# Altium PCB Slave_V1.PcbDoc
Units mil, origin at the board's own origin, x right, y up, seen from the top; angles counter-clockwise.
Board outline 1505 x 2615 mil, 2 copper layers (Top Layer, Bottom Layer); 51 components, 33 nets, 187 pads, 88 vias.
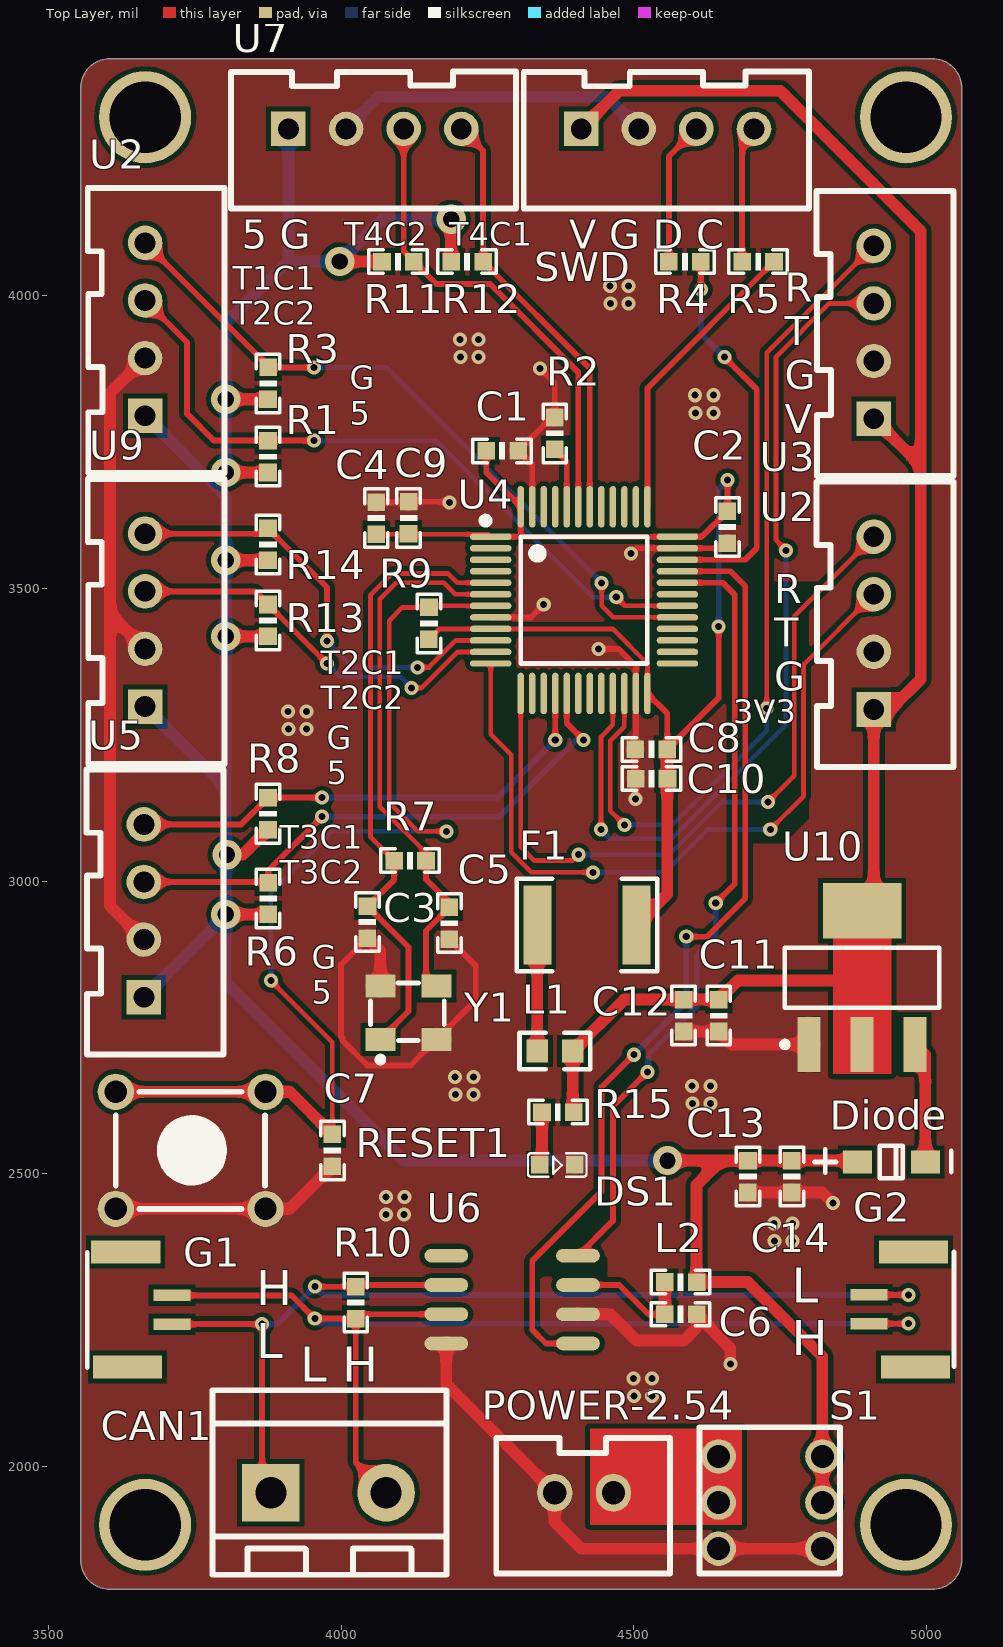
[diagram p0: Top Layer view]
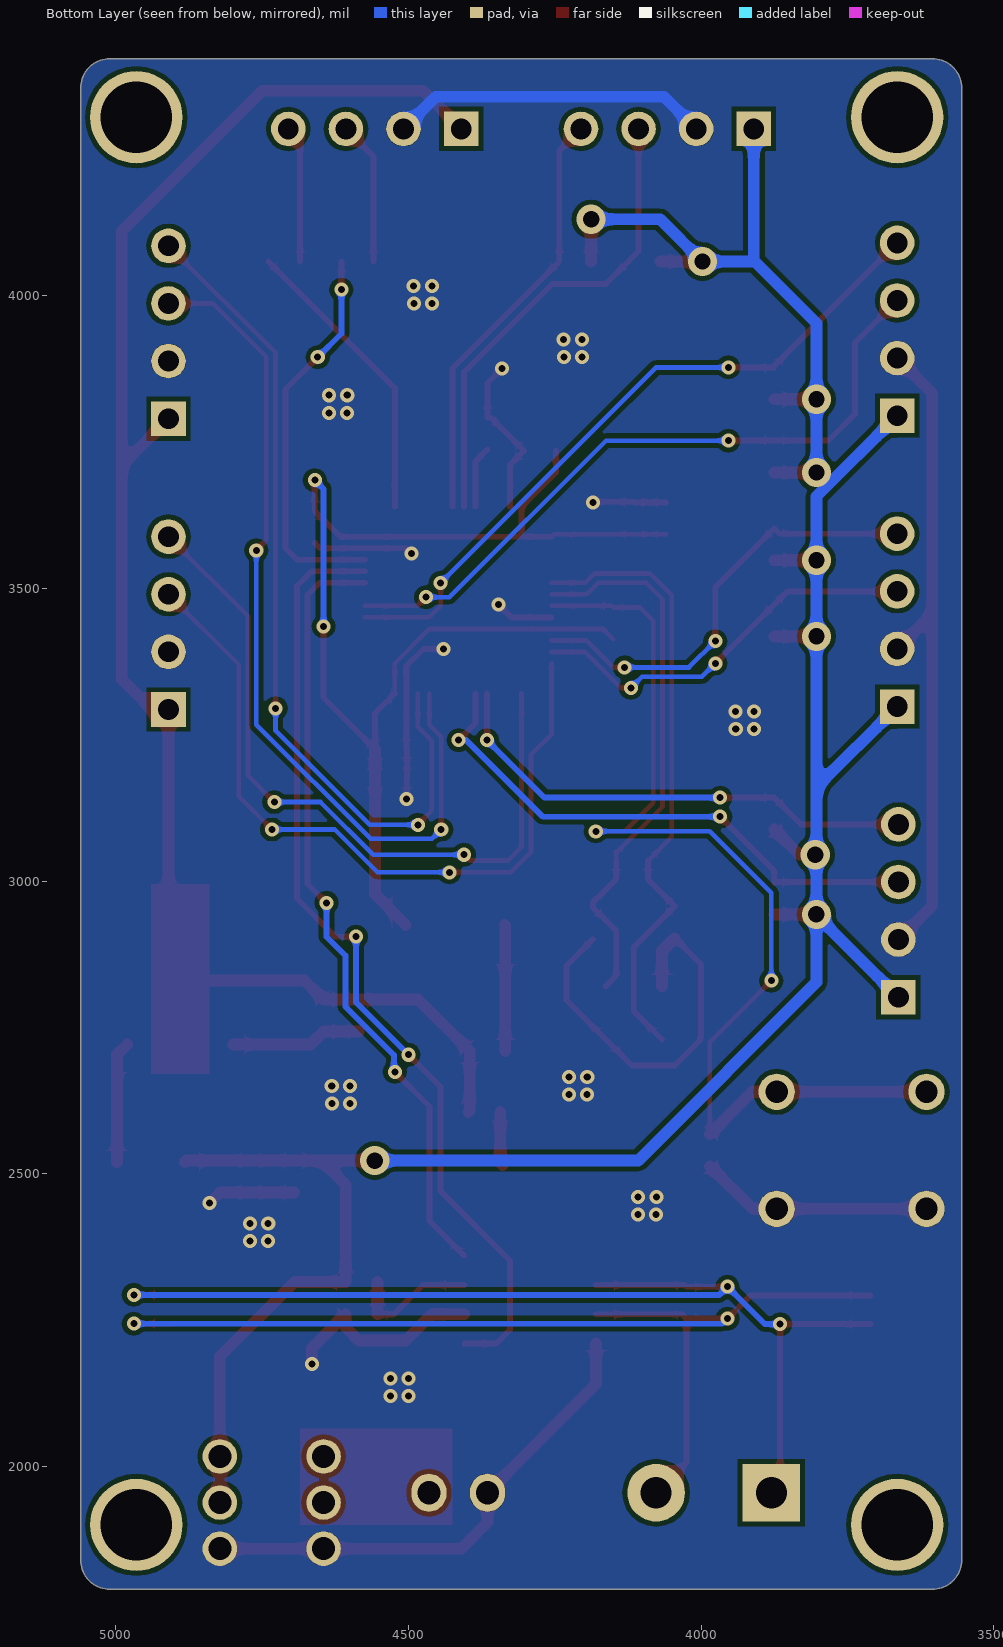
[diagram p1: Bottom Layer view, seen from below]

## Layer stack, top to bottom
Top Solder: solder mask 0.4, Solder Resist, Dk 3.5
Top Layer: signal copper 1.4
Dielectric 1: dielectric 12.6, FR-4, Dk 4.8
Bottom Layer: signal copper 1.4
Bottom Solder: solder mask 0.4, Solder Resist, Dk 3.5

## Board outline
3555,1840 ccw(c3605,1840) 3605,1790 5010,1790 ccw(c5010,1840) 5060,1840 5060,4355 ccw(c5010,4355) 5010,4405 3605,4405 ccw(c3605,4355) 3555,4355

## Design rules (kind name [scope] priority, off if disabled: settings)
Clearance [All] p1: gap=8 ignorepadtopadclearanceinfootprint=FALSE
PolygonConnect [IsVia] p1: connectstyle=Direct reliefconductorwidth=10 reliefentries=4 polygonreliefangle="90 Angle" airgapwidth=10
RoutingVias [All] p1: holewidth=28 width=50 viastyle="Through Hole" minholewidth=28 minwidth=50 maxholewidth=28 maxwidth=50
SolderMaskExpansion [All] p1: expansion=4
Width gnd [All] p1: maxlimit=30 minlimit=8 preferedwidth=15
Width 5v [All] p2: maxlimit=30 minlimit=8 preferedwidth=15
Width [All] p3: maxlimit=20 minlimit=6 preferedwidth=8
30 further rules are at their usual default settings.

## Classes and differential pairs
net class GND: GND
net class 5V: 5V

## Components (designator, comment, footprint, x,y, rotation, side; value= is the part's Value field where it differs from the comment)
C1 "0.1uf" 0603P 4275,3735 r0 top
C2 "0.1uf" 0603P 4660,3605 r270 top
C3 "22PF" 0603P 4045,2930 r270 top
C4 "0.1uf" 0603P 4060,3620 r270 top
C5 "22" 0603P 4185,2928 r270 top
C6 "104" 0603P 4579.76,2260 r0 top
C7 "0.1uf" 0603P 3985,2540 r90 top
C8 "1uf" 0603P 4530,3225 r180 top
C9 "0.1uf" 0603P 4115.06,3620.43 r90 top
C10 "0.1uf" 0603P 4530,3175 r0 top
C11 "104" 0603P 4645,2770 r90 top
C12 "104" 0603P 4585,2770 r90 top
C13 "106" 0603P 4695,2495 r90 top
C14 "104" 0603P 4770,2495 r90 top
CAN1 "CAN" HEAD2L-0.8 3880,1955 r0 top
Diode "D1" LC-SOD-123F 4940,2520 r180 top
DS1 "LED1" 0603_LED 4368.16,2515 r0 top
F1 "0.3A 60VPTC FUSE" LC-1812_R 4420,2925 r0 top
G1 "CAN-GH1.25" GH1.25_1*2_lishi 3565.94,2169 r90 top
G2 "CAN-GH1.25" GH1.25_1*2_lishi 5047.06,2367 r270 top
L1 "220R,2.0A,0.05DCR" L_0603 4365.16,2709.66 r0 top
L2 "220R,2.0A,0.05DCR" 0603P 4579.76,2315 r0 top
POWER-2.54 "XH2.54" XH2.54-2 4465,1955 r0 top
R1 "3.3K" 0603P 3875,3725 r90 top
R2 "10K" 0603P 4365,3765 r270 top
R3 "3.3K" 0603P 3875.06,3850 r90 top
R4 "100R" 0603P 4587.5,4058.3 r180 top
R5 "100R" 0603P 4712.5,4058.3 r180 top
R6 "3.3K" 0603P 3875.13,2970 r90 top
R7 "1M" 0603P 4117.5,3035.06 r0 top
R8 "3.3K" 0603P 3875,3115 r90 top
R9 "10K" 0603P 4150,3440 r90 top
R10 "120R" 0603P 4025,2280 r270 top
R11 "3.3K" 0603P 4096.85,4058.43 r0 top
R12 "3.3K" 0603P 4215,4058.43 r0 top
R13 "3.3K" 0603P 3875,3445 r90 top
R14 "3.3K" 0603P 3875,3575 r90 top
R15 "470R" 0603P 4370.16,2605.37 r0 top
RESET1 "KEY_M" KEY_M 3615,2640 r0 top
S1 "自锁开关" 自锁开关5.8*5.8 4822.17,2017 r270 top
SWD "HEADER" XH2.54-4 4410,4285 r0 top (schematic designator U1)
U2 "串口通信" XH2.54-4 4910,3293.15 r90 top (schematic designator U8)
U2 "编码器" XH2.54-4 3665,3795 r90 top
U3 "串口通信" XH2.54-4 4910,3790 r90 top
U4 "STM32F103C8T6" LQFP-48_7x7x05P 4415,3480 r270 top
U5 "编码器" XH2.54-4 3663,2801.57 r90 top
U6 "TJA1050" SOP8 4292.24,2285 r90 top
U7 "编码器" XH2.54-4 3910,4285 r0 top
U9 "编码器" XH2.54-4 3665,3298.15 r90 top
U10 "AMS1117-3.3" SOT223 4890,2835 r0 top locked
Y1 "8MHZ-无源" "XTAL3225   无源" 4115,2775 r0 top

## Footprints (in the part's own frame and the unit in brackets; to place one, negate y for a bottom-side part, rotate by r counter-clockwise, add the part's x,y. Pads: shape width x height; smd on the part's side, far side on the other; paste and mask are expansions set on the pad)
0603_LED [mil]
  rect 30x30 smd: 1(-29,0) 2(31,0)
  silkscreen extent -49,-20 51,20, body extent -40,-25 40,25, height 43
0603P [mil]
  rect 30x30 smd: 1(-27,0) 2(27.5,-0.06)
  silkscreen extent -50,-20 50,20
GH1.25_1*2_lishi [mm]
  rect 0.5x1.6 smd: 1(1.88,-3.683) 2(3.13,-3.683)
  rect 1x3 smd: ""(0.025,-1.753) ""(5.004,-1.676)
  silkscreen extent 0,0 5,0
HEAD2L-0.8 [mm]
  rect 2.5x2.5 hole 1.35: 1(0,0)
  round 2.5 hole 1.35: 2(5,0)
  silkscreen extent -2.54,-3.56 7.62,4.44
KEY_M [mil]
  round 62 hole 38: 1(0,0) 1(255.91,0) 2(0,-200) 2(255.91,-200)
  silkscreen extent 0,-200 255,0
L_0603 [mm]
  rect 0.93x0.98 smd: 1(-0.77,0) 2(0.77,0)
  silkscreen extent -1.54,-0.79 1.53,0.79, body extent -0.85,-0.4 0.85,0.4, height 0.56
LC-1812_R [mm]
  rect 1.2x3.42 smd: 1(-2.15,0) 2(2.15,0)
  silkscreen extent -3.05,-2.01 3.05,2.01, body extent -2.25,-1.6 2.25,1.6, height 0.59
LC-SOD-123F [mm]
  rect 1.25x1 smd: 1(1.475,0) 2(-1.475,0)
  silkscreen extent -2.59,-0.7 3.35,0.7, body extent -1.9,-0.85 1.85,0.85, height 1.2
LQFP-48_7x7x05P [mm]
  oval 0.28x1.8 smd mask+0.051: 1(-2.75,-4.05) 2(-2.25,-4.05) 3(-1.75,-4.05) 4(-1.25,-4.05) 5(-0.75,-4.05) 6(-0.25,-4.05) 7(0.25,-4.05) 8(0.75,-4.05) 9(1.25,-4.05) 10(1.75,-4.05) 11(2.25,-4.05) 12(2.75,-4.05) 25(2.75,4.05) 26(2.25,4.05) 27(1.75,4.05) 28(1.25,4.05) 29(0.75,4.05) 30(0.25,4.05) 31(-0.25,4.05) 32(-0.75,4.05) 33(-1.25,4.05) 34(-1.75,4.05) 35(-2.25,4.05) 36(-2.75,4.05)
  oval 1.8x0.28 smd mask+0.051: 13(4.05,-2.75) 14(4.05,-2.25) 15(4.05,-1.75) 16(4.05,-1.25) 17(4.05,-0.75) 18(4.05,-0.25) 19(4.05,0.25) 20(4.05,0.75) 21(4.05,1.25) 22(4.05,1.75) 23(4.05,2.25) 24(4.05,2.75) 37(-4.05,2.75) 38(-4.05,2.25) 39(-4.05,1.75) 40(-4.05,1.25) 41(-4.05,0.75) 42(-4.05,0.25) 43(-4.05,-0.25) 44(-4.05,-0.75) 45(-4.05,-1.25) 46(-4.05,-1.75) 47(-4.05,-2.25) 48(-4.05,-2.75)
  silkscreen extent -3.6,-4.42 2.75,2.75, body extent -4.5,-4.5 4.5,4.5, height 1.45
SOP8 [mm]
  round 0.508 on Top Overlay: 0(-3.175,-2.858)
  oval 0.6x1.9 smd: 1(-1.905,-2.858) 2(-0.635,-2.858) 3(0.635,-2.858) 4(1.905,-2.858) 5(1.905,2.858) 6(0.635,2.858) 7(-0.635,2.858) 8(-1.905,2.858)
  body extent -2.49,-2 2.49,1.99, height 1.75
SOT223 [mm]
  rect 1x2.4 smd: 1(-2.3,-2.9) 2(0,-2.9) 3(2.3,-2.9)
  rect 3.4x2.4 smd: 4(0,2.9)
  silkscreen extent -3.47,-3.02 3.35,1.3, body extent -3.35,-1.85 3.35,1.85, height 1.8
XH2.54-2 [mil]
  oval 60x65 hole 39.37: 1(0,0) 2(-100.1,0)
  silkscreen extent -200,-138 97,93, body extent -198,-142 98,94, height 276
XH2.54-4 [mm]
  rect 1.5x1.5 hole 0.9: 1(0,0)
  round 1.5 hole 0.9: 2(2.5,0) 3(5,0) 4(7.5,0)
  silkscreen extent -2.49,-3.45 9.88,2.49, body extent -2.47,-3.38 9.93,2.37, height 7
"XTAL3225   无源" [mil]
  rect 51.18x39.37 smd: 1(-48,-45.5) 2(48,-45.5) 3(48,45.5) 4(-48,45.5)
  silkscreen extent -65,-85 61,51
自锁开关5.8*5.8 [mm]
  round 1.5 hole 1: 1(0,-4.5) 2(2,-4.5) 3(4,-4.5) 4(0,0) 5(2,0) 6(4,0)
  silkscreen extent -1.27,-5.33 5.08,0.77

## Part data
C1 C2 C3 C4 C5 C6 C7 C8 C9 C10 C11 C12 C13 C14: library part C
CAN1: library part HEAD2
Diode: library part 肖特基
DS1: library part LED2, "Typical RED, GREEN, YELLOW, AMBER GaAs LED", PackageDocument=Feb-2002, LatestRevisionDate=17-Jul-2002, LatestRevisionNote="Re-released for DXP Platform.", PackageReference=3.2X1.6X1.1, Published=8-Jun-2000, Publisher="Altium Limited"
F1: library part "Fuse 1_2", "Fuse", LatestRevisionDate=17-Jul-2002, LatestRevisionNote="Re-released for DXP Platform.", PackageDescription="Thru-Hole; 2 Leads", PackageReference=PIN-W2/E2.8, Published=8-Jun-2000, Publisher="Altium Limited"
G1 G2: library part GH1.25-CAN
L1 L2: library part L
POWER-2.54: library part XH2.54-2
R1 R3 R6 R8 R11 R12 R13 R14: library part R-0805, "R-0805"
R2 R4 R5 R7 R9 R10 R15: library part R
S1: library part Switch_5.8
SWD U2 U3: library part XH2.54插座-4P
U2 U5 U7 U9: library part 编码器4P
U6: library part SN65HVD230D
U10: library part AMS1117
Y1: library part XTAL-3225

## Free pads (board coordinates)
  round 157.48 hole 122.05: 0(3665,1900) 0(3665,4305) 0(4965,1900) 0(4965,4305)

## Via types
v1: diameter 24, hole 12, Top Layer to Bottom Layer, tented both sides, 79 vias
v2: diameter 50, hole 28, Top Layer to Bottom Layer, tented both sides, 9 vias

## Nets (pads, with @x,y where several pads share a name; then routed paths per layer and width w, separated by ;. In a path a pad name is that pad's centre, name@x,y a point inside that pad or via, vN(x,y) a via of type N, cw(c..) or ccw(c..) an arc to the next point about the centre after c; other vN are vias at no path point)
3V3: C11.2 C12.2 L1.2 R15.2 SWD.1 U2.1@4910,3293.15 U3.1 U10.2 U10.4 | length 2707.8
  Top Layer w20: R15.2 4395.47,2607.49 L1.2 4483.31,2797.5 C12.2 C11.2 4677.56,2830 4910,2830 ; SWD.1 4475,4350 4750,4350 4990,4110 4990,3710 ; U10.4 4910,2969.17 4910,3293.15 4938.15,3293.15 4990,3345 4990,3710 ; U3.1 4990,3710
3V3_MCU: C1.1 C2.1 C4.2 C8.1 C9.1 C10.2 F1.2 R9.1 U4.1 U4.9 U4.24 U4.36 U4.48 | length 2236.1
  Top Layer w8: C4.2 4251.32,3592.5 U4.1 ; R9.1 4167.79,3430.79 U4.9 4464.21,3430.79 4523.27,3371.73 U4.24
  Top Layer w10: C1.1 4248,3698.18 U4.48 4306.73,3593.27 4311.73,3588.27 ; U4.1 4311.73,3588.27 ; U4.24 4557,3286.82 C8.1 4645.06,3313.06 v1(4645.06,3435) ; v1(4660,3684.94) C2.1 4616.27,3588.27 U4.36 4311.73,3588.27
  Top Layer w20: F1.2 4557,2977.35 C8.1
  Bottom Layer w10: v1(4645.06,3435) 4645.06,3670 v1(4660,3684.94)
5V: C13.2 C14.2 Diode.1 L2.2 R1.1 R3.1 R6.1 R8.1 R11.1 R12.1 R13.1 R14.1 S1.4 S1.5 U2.1@3665,3795 U5.1 U7.1 U9.1 | length 4899.7
  Top Layer w20: v2(3802.87,3418) R13.1 ; v2(3802.87,3548) R14.1 ; v2(3802.87,3698) R1.1 ; v2(3802.94,3823) R3.1 ; v2(3803,2943) R6.1 ; v2(3805,3045) 3832,3045 R8.1 ; v2(3997.72,4058.43) R11.1 ; R12.1 v2(4188,4130.55) ; v2(4557.5,2522.5) 4648.56,2522.5 ; S1.5 S1.4 4822.17,2187.77 4695,2314.94 L2.2 4607.26,2481.2 4648.56,2522.5 ; Diode.1 4879.43,2522.5 C14.2 C13.2 4648.56,2522.5
  Bottom Layer w20: U5.1 v2@3803,2941.57 ; U9.1 3803,3160.15 ; U2.1@3665,3795 3803,3657 3803,3160.15 ; v2@3803,3698 3803,3822.94 v2(3802.94,3823) 3802.94,3952.94 3908.43,4058.43 ; U7.1 3910,4060 3908.43,4058.43 ; v2(4188,4130.55) 4069.85,4130.55 v2(3997.72,4058.43) 3908.43,4058.43 ; v2(4557.5,2522.5) 4107.5,2522.5 3803,2827 v2@3803,2941.57 ; v2@3803,2941.57 v2(3803,2943) 3803,3160.15
CAN1_H: CAN1.2 G1.2 G2.2 R10.2 U6.7 | length 1892.4
  Top Layer w10: G1.2 3915.22,2292.21 v1(3954.94,2252.5) R10.2 ; CAN1.2 4024.94,2006.91 R10.2 ; U6.7 4032.44,2260 R10.2 ; G2.2 v1(4969.21,2243.79)
  Bottom Layer w10: v1(3954.94,2252.5) 3963.65,2243.79 v1(4969.21,2243.79)
CAN1_L: CAN1.1 G1.1 G2.1 R10.1 U6.6 | length 1877.9
  Top Layer w10: G1.1 v1(3865,2243) 3865,1970 CAN1.1 ; v1(3955,2307) R10.1 4028,2310 U6.6 ; G2.1 v1(4969.21,2293)
  Bottom Layer w10: v1(3865,2243) 3891,2243 v1(3955,2307) 3969,2293 v1(4969.21,2293)
"CAN RX": U4.32 U6.4 | length 1346.2
  Top Layer w10: U6.4 4464.21,2419.45 4464.21,2615 v1(4523.27,2674.06) ; U4.32 4651.84,3509.53 4672.32,3489.06 4672.32,2995 v1(4640,2962.68)
  Bottom Layer w10: v1(4523.27,2674.06) 4525,2675.79 4525,2702.85 4607.56,2785.42 4607.56,2872.56 4640,2905 v1(4640,2962.68)
"CAN TX": U4.33 U6.1 | length 1656.5
  Top Layer w10: U6.1 4350,2210 4326.42,2233.58 4326.42,2351.42 4445,2470 4445,2648.31 v1(4500,2703.31) ; U4.33 4665.32,3529.21 4690.32,3504.21 4690.32,2970.32 4625,2905 v1(4589.56,2905)
  Bottom Layer w10: v1(4500,2703.31) 4589.56,2792.87 v1(4589.56,2905)
GND: C1.2 C2.2 C3.2 C4.1 C5.2 C6.2 C7.1 C8.2 C9.2 C10.1 C11.1 C12.1 C13.1 C14.1 DS1.2 POWER-2.54.2 R2.1 RESET1.2 S1.3 S1.6 SWD.2 U2.2 U3.2 U4.8 U4.23 U4.35 U4.47 U5.2 U6.2 U6.8 U7.2 U9.2 U10.1 Y1.2 Y1.4 | length 5356.2
  Top Layer w10: C3.2 4000,2857.56 4000,2734.04 4002.06,2731.98 4002.06,2727.94 4045,2685 4118.5,2685 Y1.2 4230,2796.5 4230,2855.44 C5.2 ; C4.1 4114.2,3647 C9.2 4184.07,3647.93 v1(4185,3647) ; U4.8 4324.46,3450.47 4346.1,3472.11 v1(4346.1,3472.5) ; U4.47 4326.42,3711.02 C1.2 4359.56,3792 R2.1 4365,3851.02 v1(4340,3876.02) ; v1(4440,3396.57) 4474.38,3396.57 4503.58,3367.38 U4.23 4503.58,3226.15 C8.2 4502.5,3175.5 C10.1 v1(4503,3140) ; v1(4495,3560) 4503.58,3568.58 U4.35 4651.02,3568.58 C2.2
  Top Layer w20: RESET1.2@3615,2440 3870.91,2440 3912,2440 C7.1 ; U5.2 3605,2958 3605,3456.57 ; U9.2 3605,3456.57 ; U2.2@3665,3893.43 3605,3833.43 3605,3456.57 ; C3.2 4067,2880.44 Y1.4 ; U6.8 4179.72,2140.18 POWER-2.54.2 4364.9,1904.62 4410,1859.52 S1.3 S1.6 ; U6.2 4460,2260 4505,2215 4585,2215 4607.26,2237.26 C6.2 4665,2202.2 v1(4665,2175) ; C12.1 C11.1 4667.17,2720.83 U10.1 ; C13.1 C14.1 4822,2468 v1(4840,2450)
  Bottom Layer w20: U7.2 4063.43,4340 4453.43,4340 SWD.2
  other v1: 4500,2120 4530.87,2120 4499.56,2150 4531.06,2150 4740,2385 4770.87,2385 4739.56,2415 4771.06,2415 4076.85,2430 4107.72,2430 4076.41,2460 4107.91,2460 4600,2620 4630.87,2620 4195,2635 4225.87,2635 4599.56,2650 4631.06,2650 4194.56,2665 4226.06,2665 3910,3260 3940.87,3260 3909.56,3290 3941.06,3290 4605,3800 4635.87,3800 4604.56,3830 4636.06,3830 4203.68,3895 4234.56,3895 4203.25,3925 4234.75,3925 4460,3986.85 4490.87,3986.85 4459.56,4016.85 4491.06,4016.85
NetC3_1: C3.1 R7.1 U4.5 Y1.1 | length 1070.7
  Top Layer w8: R7.1 4050,3075.56 4050,3488 4087.53,3525.53 4182.1,3525.53 4198.1,3509.53 U4.5
  Top Layer w10: Y1.1 4115,2777.5 4115,2887 C3.1 4090.5,3002.5 R7.1
NetC5_1: C5.1 R7.2 U4.6 Y1.3 | length 943.6
  Top Layer w8: R7.2 4145,3048 4066,3127 4066,3481.37 4094.16,3509.53 4175.47,3509.53 4195.16,3489.84 U4.6
  Top Layer w10: R7.2 4145,3003 4185,2963 C5.1 4145,2915 4145,2838.5 Y1.3
NetC6_1: C6.1 L2.1 U6.3 | length 223.7
  Top Layer w10: U6.3 4475,2310 4525,2260 C6.1
  Top Layer w20: C6.1 L2.1
NetC7_2: C7.2 R9.2 RESET1.1 U4.7 | length 1813.1
  Top Layer w8: v1(3880,2830) 3985.06,2724.94 C7.2 ; v1(4180,3085) 4130.63,3085 4082,3133.63 4082,3445 4104.5,3467.5 R9.2 4152.72,3470.16 U4.7
  Top Layer w20: RESET1.1@3615,2640 3870.91,2640 3912.56,2640 C7.2
  Bottom Layer w8: v1(3880,2830) 3880,2980 3985,3085 v1(4180,3085)
NetDiode_2: Diode.2 U10.3 | length 208.1
  Top Layer w20: U10.3 4998.07,2703.31 Diode.2
NetDS1_1: DS1.1 R15.1 | length 92
  Top Layer w20: DS1.1 4343.16,2519 R15.1
NetF1_1: F1.1 L1.1 | length 215.6
  Top Layer w20: L1.1 4334.84,2924.49 F1.1
NetPOWER-2.54_1: POWER-2.54.1 S1.1 S1.2
NetR2_2: R2.2 U4.44 | length 106.6
  Top Layer w10: R2.2 4385.47,3716.96 U4.44
NetR4_2: R4.2 SWD.3 | length 246
  Top Layer w10: R4.2 4560,4238.15 SWD.3
NetR5_2: R5.2 SWD.4 | length 235
  Top Layer w10: R5.2 4685,4264.72 SWD.4
SWCLK: R5.1 U4.37 | length 508.4
  Top Layer w10: U4.37 4523.27,3842.07 R5.1
SWDIO: R4.1 U4.34 | length 673
  Top Layer w10: U4.34 4690.32,3548.9 4710,3568.58 4710,3840 v1(4655,3895) ; v1(4614.5,4010.5) R4.1
  Bottom Layer w10: v1(4614.5,4010.5) 4614.5,3935.5 v1(4655,3895)
TIM1_CH1: R3.2 U2.4@3665,4090.28 U4.29 | length 1199.2
  Top Layer w8: v1(4445,3509.53) 4445,3470 4464.53,3450.47 U4.29
  Top Layer w10: U2.4@3665,4090.28 3875.13,3880.15 R3.2 v1(3953.52,3877.5)
  Bottom Layer w8: v1(3953.52,3877.5) 4077.03,3877.5 v1(4445,3509.53)
TIM1_CH2: R1.2 U2.3@3665,3991.85 U4.30 | length 1196.9
  Top Layer w8: v1(4470,3485) 4484.84,3470.16 U4.30
  Top Layer w10: U2.3@3665,3991.85 3736.85,3920 3736.85,3798.15 3782.5,3752.5 R1.2 v1(3953.46,3752.5)
  Bottom Layer w8: v1(3953.46,3752.5) 4162.5,3752.5 4430,3485 v1(4470,3485)
TIM2_CH1: R14.2 U4.10 U9.4 | length 765.5
  Top Layer w8: v1(4130.63,3365) 4150,3365 4196.1,3411.1 U4.10
  Top Layer w10: U9.4 3865.99,3593.43 R14.2 3975.83,3501.73 v1(3975.83,3410)
  Bottom Layer w8: v1(3975.83,3410) 4020.83,3365 v1(4130.63,3365)
TIM2_CH2: R13.2 U4.11 U9.3 | length 684.3
  Top Layer w8: v1(4120,3330) 4137.63,3330 4199.05,3391.42 U4.11
  Top Layer w10: U9.3 3852.56,3495 R13.2 v1(3975.83,3371.73)
  Bottom Layer w8: v1(3975.83,3371.73) 3998.56,3349 4101,3349 v1(4120,3330)
TIM3_CH1: R8.2 U4.16 U5.4 | length 842.2
  Top Layer w10: U5.4 3829.41,3096.85 R8.2 v1(3967.5,3142.5) ; v1(4365.79,3240.79) U4.16
  Bottom Layer w10: v1(3967.5,3142.5) 4267.5,3142.5 v1(4365.79,3240.79)
TIM3_CH2: R6.2 U4.17 U5.3 | length 955.9
  Top Layer w10: U5.3 3874.27,2998.43 R6.2 3875.19,3017.69 v1(3967.5,3110) ; U4.17 4385.47,3269.53 v1(4414.21,3240.79)
  Bottom Layer w10: v1(3967.5,3110) 4270.36,3110 4401.14,3240.79 v1(4414.21,3240.79)
TIM4_CH1: R12.2 U4.42 U7.4 | length 736.5
  Top Layer w10: U7.4 4242.5,4247.78 R12.2 4424.84,3876.02 U4.42
TIM4_CH2: R11.2 U4.43 U7.3 | length 822.9
  Top Layer w10: U7.3 4106.85,4075.86 R11.2 4162.71,4020 4254.56,4020 4405.16,3869.41 U4.43
U2_RX: U2.4@4910,3588.43 U4.13 | length 1264
  Top Layer w8: U4.13 4306.73,3058.27 4329.94,3035.06 4395.22,3035.06 v1(4405.16,3045) ; v1(4729,3135) 4774,3180 4774,3452.43 U2.4@4910,3588.43
  Bottom Layer w8: v1(4405.16,3045) 4560.25,3045 4650.25,3135 v1(4729,3135)
U2_TX: U2.3@4910,3490 U4.12 | length 1299.1
  Top Layer w8: U4.12 4255.55,3251.18 4290.73,3216 4290.73,3049.27 4325,3015 v1(4430,3015) ; v1(4733.11,3088.11) 4790,3145 4790,3370 U2.3@4910,3490
  Bottom Layer w8: v1(4430,3015) 4552.88,3015 4625.99,3088.11 v1(4733.11,3088.11)
U3_RX: U3.4 U4.22 | length 1458.1
  Top Layer w8: v1(4483.9,3096.1) 4460,3120 4460,3240 4483.9,3263.9 U4.22 ; v1(4727,3295.15) 4727,3902.28 U3.4
  Bottom Layer w8: v1(4483.9,3096.1) 4566.1,3096.1 4727,3257 v1(4727,3295.15)
U3_TX: U3.3 U4.21 | length 1484.5
  Top Layer w8: v1(4444,3088) 4444,3246.63 4464.21,3266.84 U4.21 ; v1(4760,3565) 4743,3582 4743,3895.65 4834.2,3986.85 U3.3
  Bottom Layer w8: v1(4444,3088) 4459.9,3072.1 4564.73,3072.1 4760,3267.37 v1(4760,3565)
pads on no net: G1. G2. U4.2 U4.3 U4.4 U4.14 U4.15 U4.18 U4.19 U4.20 U4.25 U4.26 U4.27 U4.28 U4.31 U4.38 U4.39 U4.40 U4.41 U4.45 U4.46 U6.0 U6.5

## Polygon pours and split planes (outlines as drawn)
GND on Top Layer "Top Layer-No Net" (solid, remove dead copper, pour order 6): 3555,1840 ccw(c3605,1840) 3605,1790 5010,1790 ccw(c5010,1840) 5060,1840 5060,4355 ccw(c5010,4355) 5010,4405 3605,4405 ccw(c3605,4355) 3555,4355
GND on Bottom Layer "Top Layer-No Net1" (solid, remove dead copper, pour order 7): 3555,1840 ccw(c3605,1840) 3605,1790 5010,1790 ccw(c5010,1840) 5060,1840 5060,4355 ccw(c5010,4355) 5010,4405 3605,4405 ccw(c3605,4355) 3555,4355

## Other copper
Top Layer:
  rectangle net 3V3: 4840,2670 4940,2995
  rectangle net NetPOWER-2.54_1: 4424.84,1900 4685,2065
  pour cut-out: 4135.84,3317.71 4133.71,3315.58 4094.16,3315.58 4094.16,3439.85 4109.57,3455.26 4166.28,3455.26 4166.55,3455 4146.28,3434.73 4146.28,3321.35 4140.19,3321.35 4134.42,3315.58
  pour cut-out: 4354.39,2360.65 4449.91,2360.65 4455,2355.55 4455,2325 4344.83,2325 4343.16,2323.33 4339.67,2326.81 4339.67,2355 4348.74,2355
  pour cut-out: 4702.56,3065 4702.56,3512.89 4704.35,3511.1 4815,3511.1 4798.65,3494.76 4798.65,3106.37 4757.28,3065

## Silkscreen, mask and mechanical layers (free items; w line width, h text height)
Top Overlay:
  text "T4C2" at 4005,4085 h40
  text "T4C1" at 4185,4085.28 h40
  text "5 G" at 3830,4080 h50
  text "V G D C" at 4390,4080 h50
  text "T1C1 / T2C2" at 3815,3950 h40
  text "G / 5" at 4015,3780 h40
  text "R / T / G / V" at 4758.11,3765 h50
  text "R / T / G" at 4739.56,3325 h50
  text "T2C1 / T2C2" at 3965,3293.15 h40
  text "3V3" at 4670,3270 h40
  text "G / 5" at 3975.83,3165 h40
  text "T3C1 / T3C2" at 3895.19,2995 h40
  text "G / 5" at 3950,2790 h40
  text "L / H" at 4770,2190 h60
  text "H / L" at 3855,2185 h60
  text "L H" at 3930,2145 h60
Mechanical 1:
  the board outline again, w10